# Altium PCB CT310高端控制盒方向组合按键电路V1.0.PcbDoc
Units mm, origin at the board's own origin, x right, y up, seen from the top; angles counter-clockwise.
Board outline 43.18 x 42.93 mm, 2 copper layers (Top Layer, Bottom Layer), stack 1.671 mm thick; 2 components, 6 nets, 32 pads, 0 vias.
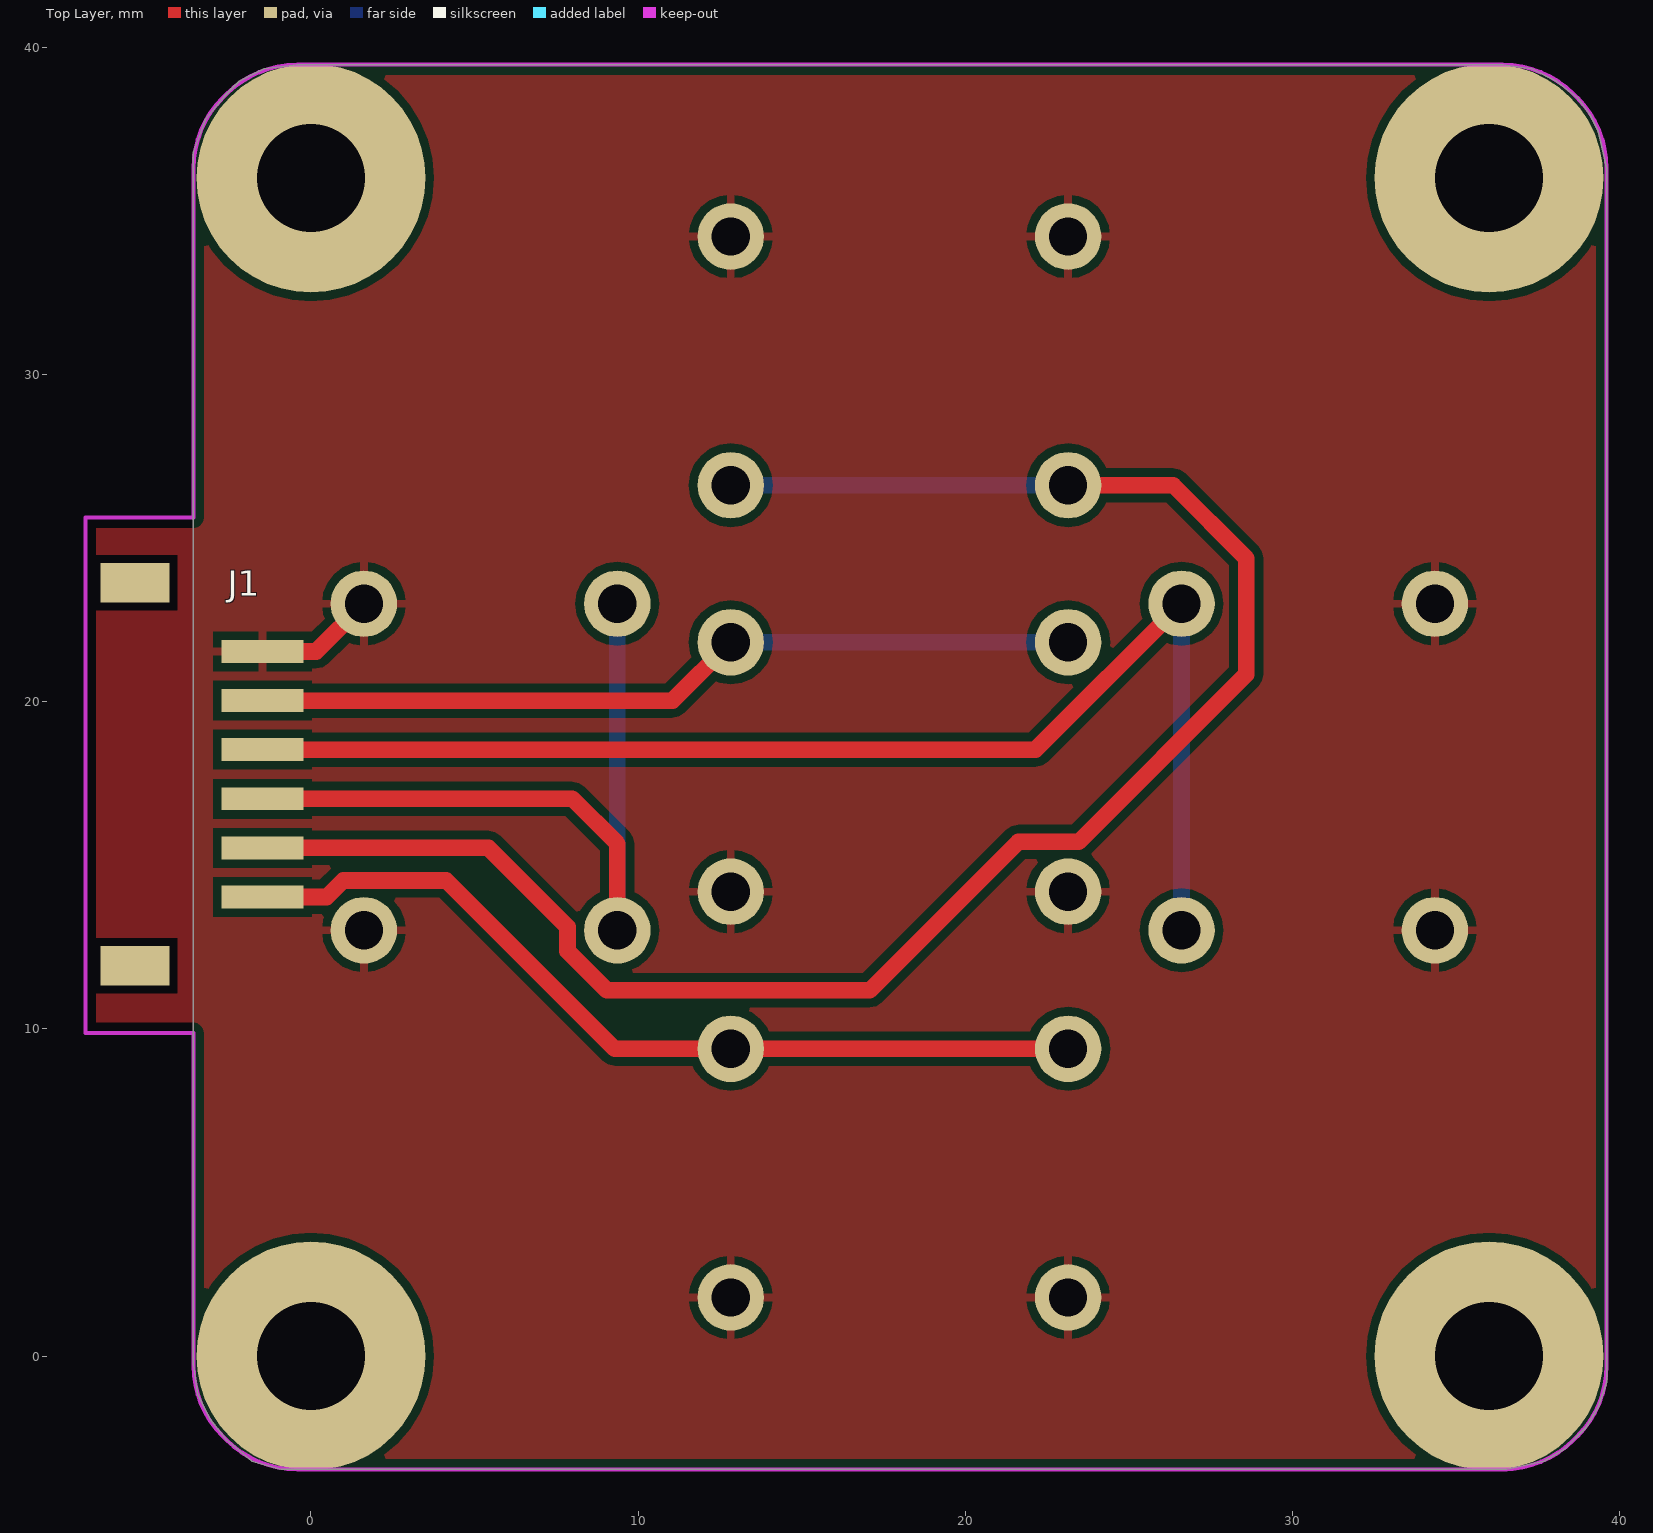
[diagram p0: Top Layer view]
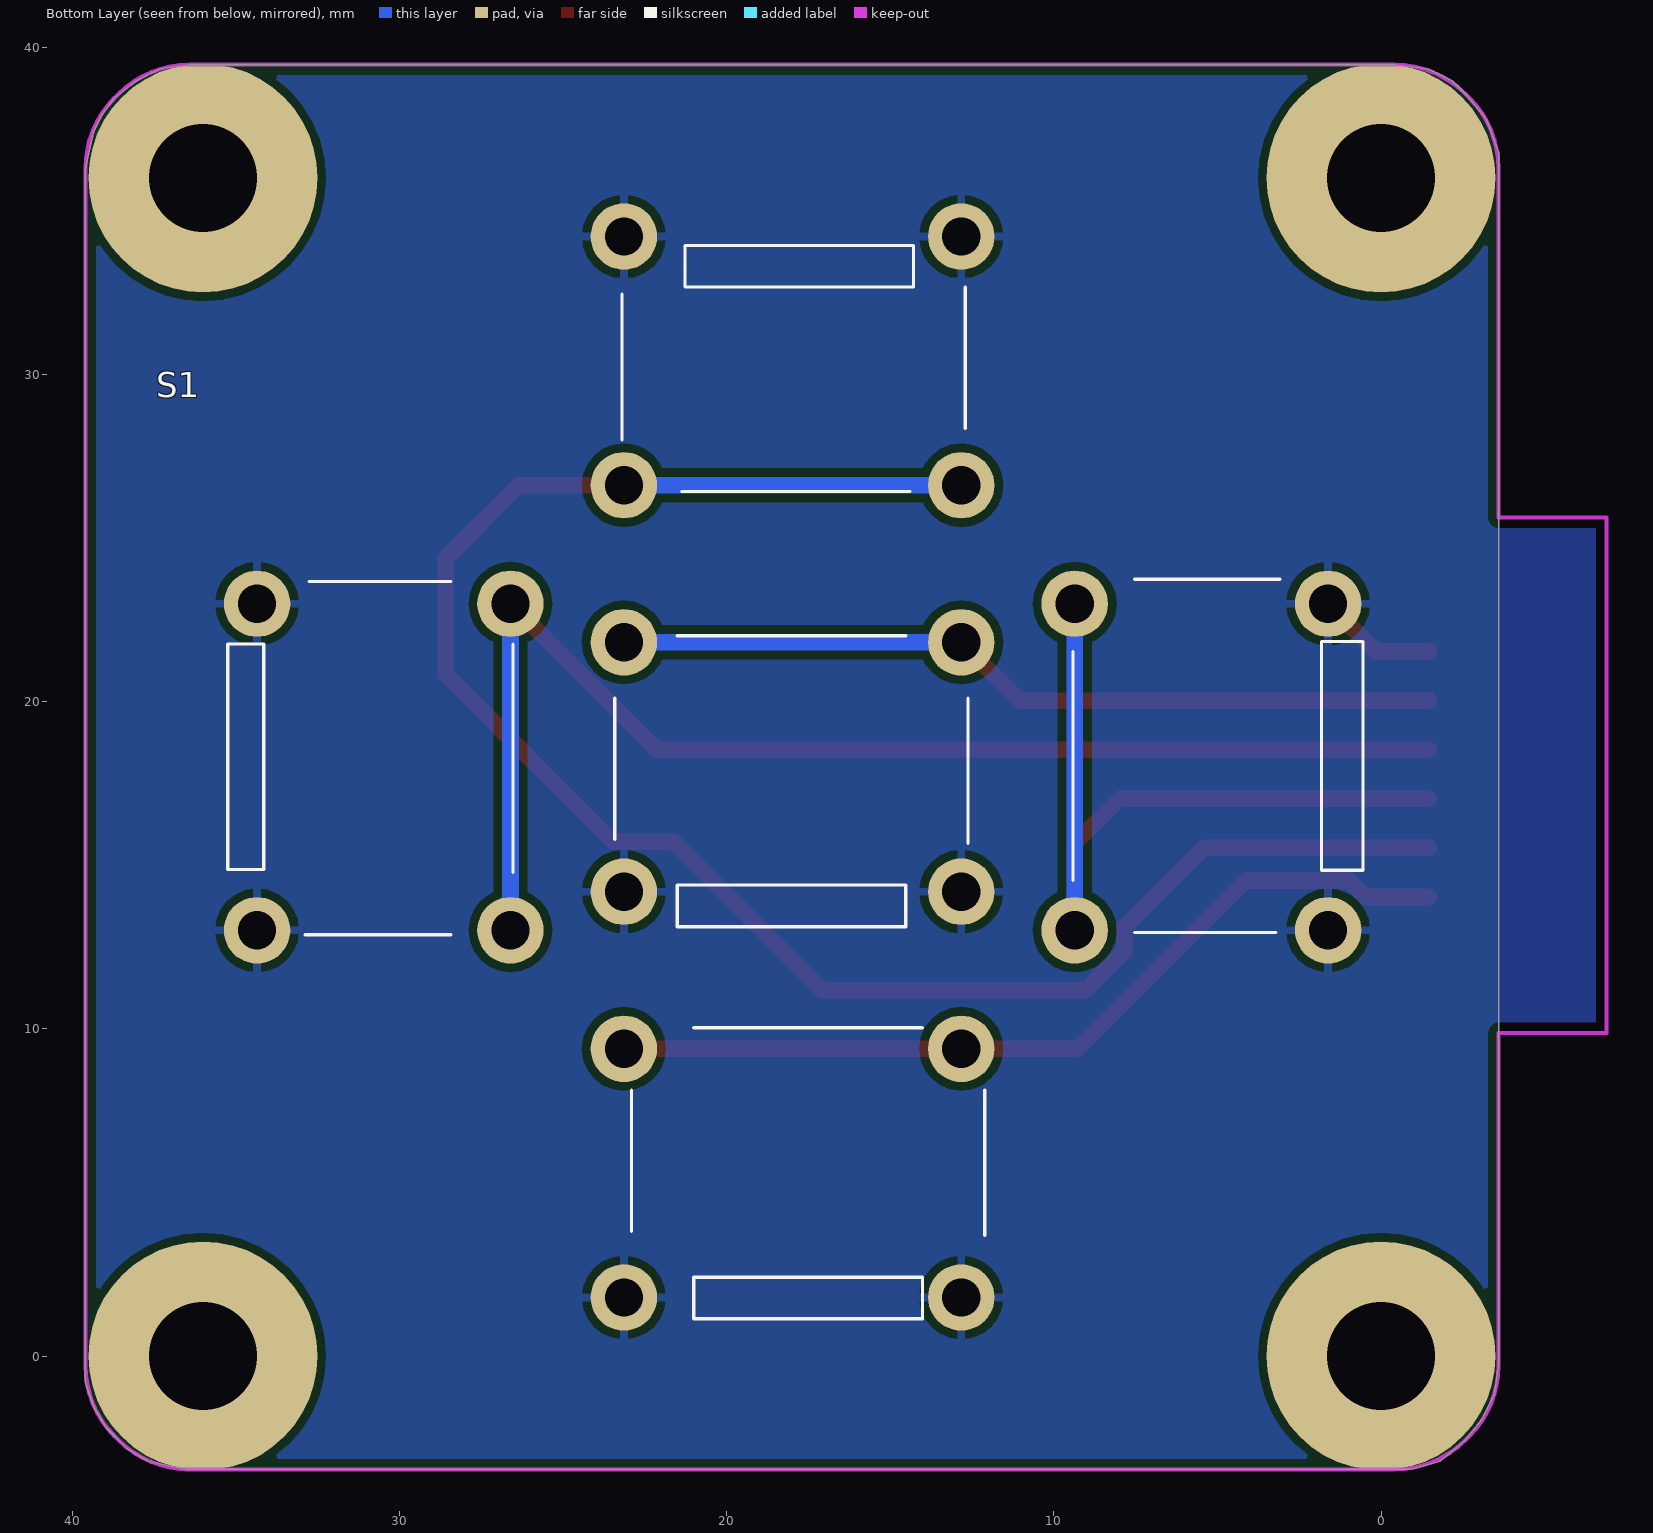
[diagram p1: Bottom Layer view, seen from below]

## Layer stack, top to bottom
Top Layer: signal copper 0.0356
Dielectric: core 1.6, FR-4, Dk 4.8
Bottom Layer: signal copper 0.0356

## Board outline
-3.59,-0.288 -3.463,-1.177 -3.082,-1.939 -2.583,-2.565 -1.812,-3.209 -0.923,-3.463 -0.288,-3.463 36.542,-3.463 37.685,-3.209 38.32,-2.828 38.955,-2.193 39.336,-1.558 39.59,-0.796 39.59,-0.288 39.59,36.288 39.336,37.431 39.082,37.939 38.692,38.456 38.066,38.955 37.304,39.336 36.415,39.463 -0.415,39.463 -1.431,39.336 -2.193,38.955 -2.637,38.511 -3.209,37.812 -3.59,36.796 -3.59,36.034 -3.59,-0.288

## Design rules (kind name [scope] priority, off if disabled: settings)
Clearance [All] p1: gap=0.254
PolygonConnect [All] p1: connectstyle=Relief reliefconductorwidth=0.254 reliefentries=4 polygonreliefangle="90 Angle" airgapwidth=0.254
RoutingVias [All] p1: holewidth=0.711 width=1.27 viastyle="Through Hole" minholewidth=0.711 minwidth=1.27 maxholewidth=0.711 maxwidth=1.27
SilkToSolderMaskClearance SilkscreenOverComponentPads [IsPad] p1: minsilkscreentomaskgap=0.254 clearancetoexposedcopper=TRUE
SolderMaskExpansion [All] p1: expansion=0.102
Width [All] p1: maxlimit=2.54 minlimit=0.254 preferedwidth=0.254 minimp=50.000000 maximp=50.000000 favimp=50.000000
27 further rules are at their usual default settings.

## Components (designator, comment, footprint, x,y, rotation, side; value= is the part's Value field where it differs from the comment)
J1 "HEADER1X6" ZH1X6WT-1.5 -3.429,17.78 r90 top
S1 "SW-4" SW-MEC-5 17.981,18 r180 bottom

## Footprints (in the part's own frame and the unit in brackets; to place one, negate y for a bottom-side part, rotate by r counter-clockwise, add the part's x,y. Pads: shape width x height; smd on the part's side, far side on the other; paste and mask are expansions set on the pad)
SW-MEC-5 [mil]
  round 80 hole 46: 1(-202.95,-638.19) 1(202.95,-638.19) 2(-202.95,-338.98) 2(202.95,-338.98) 3(-202.95,638.19) 3(202.95,638.19) 4(-202.95,338.98) 4(202.95,338.98) 5(-644.29,-196.46) 5(-644.29,196.46) 6(-339.37,-196.46) 6(-339.37,196.46) 7(644.29,-196.46) 7(644.29,196.46) 8(339.37,-196.46) 8(339.37,196.46) 9(-202.95,-150) 9(202.95,-150) 10(-202.95,150) 10(202.95,150)
  silkscreen extent -680,-664 686,627, body extent -687,-688 690,688, height 457
ZH1X6WT-1.5 [mm]
  rect 1.2x2.1 smd: 0(-5.85,1.95) 0(5.85,1.95)
  rect 0.7x2.5 smd: 1(-3.75,-1.95) 2(-2.25,-1.95) 3(-0.75,-1.95) 4(0.75,-1.95) 5(2.25,-1.95) 6(3.75,-1.95)

## Free pads (board coordinates)
  round 7 hole 3.3: 1(0,0) 1(0,36) 1(36,0) 1(36,36)

## Nets (pads, with @x,y where several pads share a name; then routed paths per layer and width w, separated by ;. In a path a pad name is that pad's centre, name@x,y a point inside that pad or via, vN(x,y) a via of type N, cw(c..) or ccw(c..) an arc to the next point about the centre after c; other vN are vias at no path point)
KEYSWIN_ED: J1.2 S1.4 | length 56.5
  Top Layer w0.508: J1.2 5.425,15.53 7.837,13.118 7.837,12.379 9.04,11.176 17.074,11.176 21.612,15.714 23.461,15.714 28.575,20.828 28.575,24.384 26.349,26.61 S1.4@23.136,26.61
  Bottom Layer w0.508: S1.4@12.826,26.61 S1.4@23.136,26.61
KEYSWIN_EL: J1.3 S1.8 | length 24
  Top Layer w0.508: J1.3 7.989,17.03 9.361,15.658 S1.8@9.361,13.01
  Bottom Layer w0.508: S1.8@9.361,13.01 S1.8@9.361,22.99
KEYSWIN_EM: J1.5 S1.10 | length 25.4
  Top Layer w0.508: J1.5 11.046,20.03 S1.10@12.826,21.81
  Bottom Layer w0.508: S1.10@12.826,21.81 S1.10@23.136,21.81
KEYSWIN_ER: J1.4 S1.6 | length 39.9
  Top Layer w0.508: J1.4 22.141,18.53 S1.6@26.601,22.99
  Bottom Layer w0.508: S1.6@26.601,13.01 S1.6@26.601,22.99
KEYSWIN_EU: J1.1 S1.2 | length 27
  Top Layer w0.508: J1.1 0.481,14.03 0.985,14.534 4.135,14.534 9.279,9.39 12.826,9.39 S1.2@23.136,9.39
SGND: J1.6 S1.1 S1.3 S1.5 S1.7 S1.9 | length 3.7
  Top Layer w0.508: J1.6 0.156,21.53 S1.7@1.616,22.99
pads on no net: J1.0

## Polygon pours and split planes (outlines as drawn)
SGND on Top Layer "Keep-Out Layer-No Net" (solid, remove dead copper, pour order 2): -6.892,9.872 -3.59,9.872 -3.59,-0.288 -0.415,-3.463 -0.127,-3.463 34.671,-3.463 36.034,-3.463 39.59,0.093 39.59,36.288 36.415,39.463 0.889,39.463 -0.415,39.463 -3.59,36.288 -3.59,25.62 -6.892,25.62 -6.892,9.872
SGND on Bottom Layer "Keep-Out Layer-No Net" (solid, remove dead copper, pour order 4): -6.892,9.872 -3.59,9.872 -3.59,-0.288 -0.415,-3.463 -0.254,-3.463 34.671,-3.463 39.59,1.456 39.59,1.778 39.59,35.433 39.59,35.907 36.034,39.463 0.889,39.463 -0.415,39.463 -3.59,36.288 -3.59,25.62 -6.892,25.62 -6.892,9.872

## Keep-outs
Keep-Out Layer:
  lines w0.127: -3.59,35.907 -3.59,36.288 cw(c-0.524,36.288) -2.692,38.456 -2.583,38.565 cw(c-0.415,36.397) -0.415,39.463 36.415,39.463 ; -3.59,36.098 -3.59,28.541 -3.59,25.62 -6.892,25.62 -6.892,9.872 -3.59,9.872 -3.59,-0.288 ccw(c-0.524,-0.288) -2.692,-2.456 -2.583,-2.565 ccw(c-0.415,-0.397) -0.415,-3.463 ; -0.034,-3.463 -0.415,-3.463 ; 36.034,39.463 36.415,39.463 ; 36.415,-3.463 ccw(c36.415,-0.397) 38.583,-2.565 38.692,-2.456 ccw(c36.524,-0.288) 39.59,-0.288 39.59,0.093 ; 36.542,-3.463 -0.415,-3.463 ; 39.59,-0.415 39.59,36.288 ccw(c36.524,36.288) 38.692,38.456 38.583,38.565 ccw(c36.415,36.397) 36.415,39.463

## Dimensions
-0.288,-3.463 to -0.415,39.463 on Keep-Out Layer
-6.892,9.872 to 39.59,-0.415 on Keep-Out Layer